# Altium PCB LKS_Motor_0313.PcbDoc (part 1 of 4)
Units mil, origin at the board's own origin, x right, y up, seen from the top; angles counter-clockwise.
Board outline 4321.51 x 591.52 mil, 2 copper layers (Top Layer, Bottom Layer); 107 components, 73 nets, 326 pads, 213 vias.
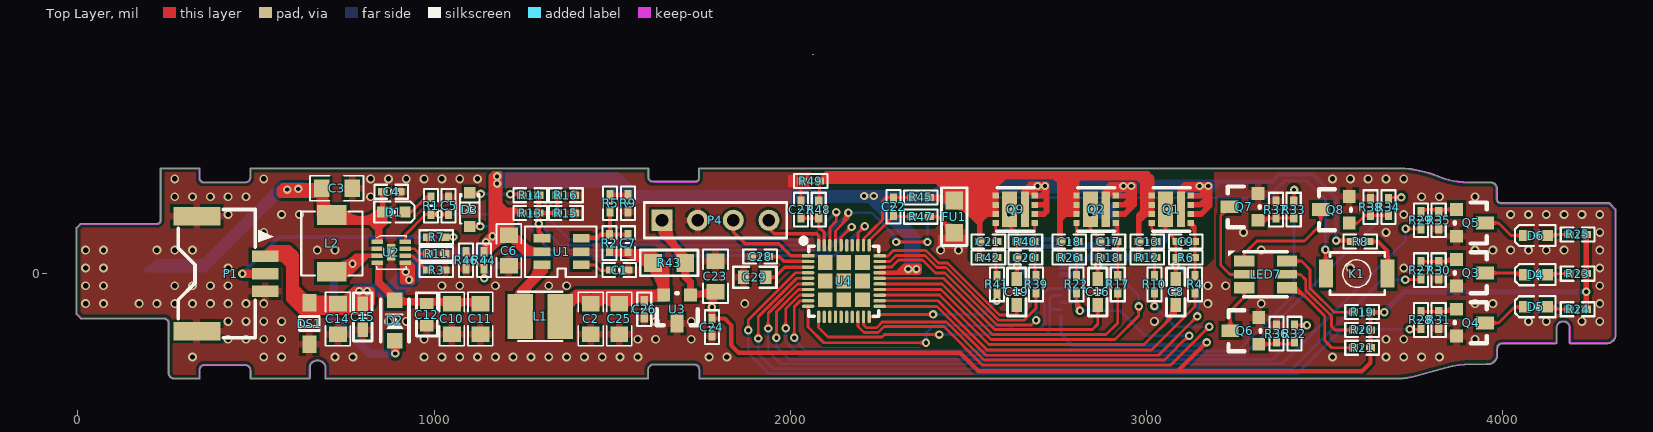
[diagram p0: Top Layer view]
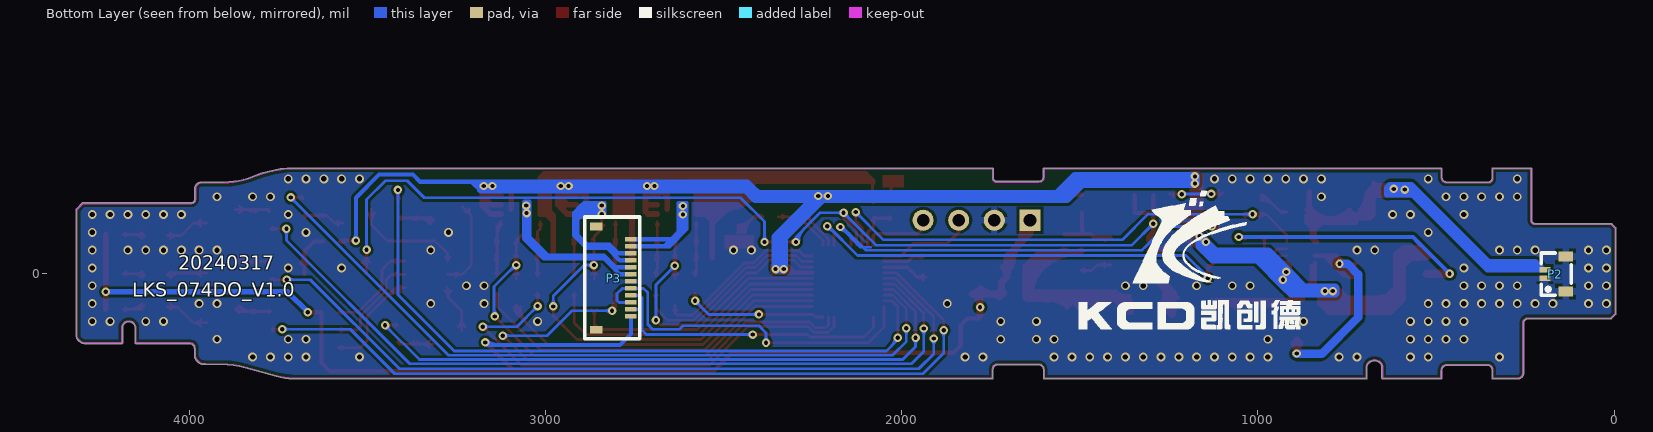
[diagram p1: Bottom Layer view, seen from below]
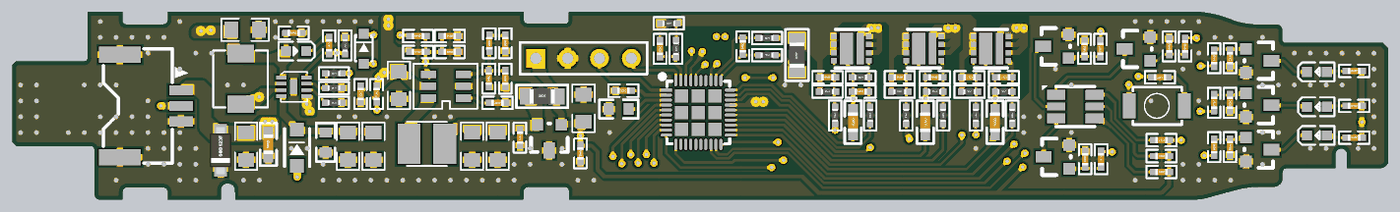
[diagram p5: 3D render of the assembled board from above, using the file's embedded part models]

## Layer stack, top to bottom
Top Solder: solder mask 0.4, Solder Resist, Dk 3.5
Top Layer: signal copper 1.4
Dielectric1: core 12.6, FR-4, Dk 4.8
Bottom Layer: signal copper 1.4
Bottom Solder: solder mask 0.4, Solder Resist, Dk 3.5

## Board outline
340.79,-295.23 ccw(c340.79,-293.25) 342.78,-293.25 342.78,-270.05 cw(c355.82,-270.05) 355.82,-257.01 469.32,-257.01 cw(c469.32,-271.91) 484.23,-271.91 484.23,-293.25 ccw(c486.21,-293.25) 486.21,-295.23 649.96,-295.23 ccw(c649.96,-293.25) 651.94,-293.25 651.94,-259.1 cw(c672.98,-266.47) 694.02,-259.1 694.02,-293.25 ccw(c696,-293.25) 696,-295.23 1599.85,-295.23 ccw(c1599.85,-293.25) 1601.84,-293.25 1601.84,-269.29 cw(c1615.4,-269.32) 1615.37,-255.76 1730.9,-255.76 cw(c1730.9,-268.67) 1743.81,-268.67 1743.81,-293.3 ccw(c1745.79,-293.3) 1745.79,-295.29 3708.08,-295.29 ccw(c3708.08,-293.3) 3708.1,-295.29 ccw(c3706.34,-133.03) 3754.89,-287.86 3826.52,-268.29 ccw(c3826,-266.38) 3826.58,-268.27 cw(c3922.68,-590.85) 3892.14,-255.65 3955.05,-254.61 ccw(c3958.35,-227.78) 3985.04,-232.11 ccw(c3983.08,-231.79) 3985.06,-231.79 ccw(c3983.08,-231.79) 3985.06,-231.77 3985.06,-210.33 cw(c3999.33,-210.33) 3999.33,-196.07 4149.75,-196.07 ccw(c4149.75,-194.08) 4151.73,-194.08 4151.73,-148.89 cw(c4169.43,-153) 4187.14,-148.89 4187.14,-194.29 ccw(c4189.12,-194.29) 4189.12,-196.28 4293.89,-196.28 ccw(c4293.91,-194.29) 4294.1,-196.27 ccw(c4291.6,-169.92) 4317.01,-177.29 ccw(c4315.11,-176.74) 4317.09,-176.74 4317.09,180.13 ccw(c4315.11,180.13) 4316.5,181.55 4316.51,181.54 4300,198.05 4300.01,198.03 ccw(c4298.6,196.64) 4298.6,198.63 3994.41,198.63 cw(c3994.41,209.02) 3984.02,209.02 3984.02,238.48 ccw(c3965.86,238.48) 3965.86,256.65 3903.32,256.65 cw(c3910.73,520.73) 3833.14,268.19 ccw(c3692.04,-53.42) 3725.14,296.22 ccw(c3724.95,294.25) 3724.95,296.23 1744.96,296.23 ccw(c1744.96,294.25) 1742.97,294.25 1742.97,268.35 ccw(c1744.96,268.35) 1742.97,268.33 cw(c1733.77,268.35) 1733.79,259.15 cw(c1733.77,268.35) 1733.77,259.15 1614.77,259.15 cw(c1614.77,271.56) 1602.36,271.56 1602.36,294.14 ccw(c1600.38,294.14) 1600.38,296.13 485.79,296.13 ccw(c485.79,294.14) 483.81,294.14 483.81,271.08 cw(c469.79,271.08) 469.79,257.06 352.69,257.06 cw(c352.69,266.98) 342.78,266.98 342.78,294.25 ccw(c340.79,294.25) 340.79,296.23 233.92,296.23 ccw(c233.92,294.25) 231.94,294.25 231.94,150.5 cw(c221.84,150.5) 221.84,140.4 7.83,140.4 ccw(c7.83,138.41) 6.41,139.81 6.42,139.82 -3.84,129.56 -3.83,129.57 ccw(c-2.43,128.15) -4.42,128.15 -4.42,-112.73 ccw(c-2.43,-112.73) -3.84,-114.13 7.93,-125.9 ccw(c9.34,-124.5) 9.34,-126.48 241.97,-126.48 cw(c241.97,-138.74) 254.23,-138.74 254.23,-278.75 ccw(c270.72,-278.75) 270.72,-295.23

## Design rules (kind name [scope] priority, off if disabled: settings)
Clearance [(InPoly)] p1: gap=8 ignorepadtopadclearanceinfootprint=FALSE except(0: Arc-Hole Track-Hole SMDPad-Hole THPad-Hole Via-Hole Fill-Hole Poly-Hole Region-Hole Text-Hole)
ComponentClearance [All] p1 off: gap=10 collisioncheckmode=3 verticalgap=10 showdistances=FALSE
FabricationTestpoint [(IsPad And (OnTopLayer Or OnBottomLayer))] p1: side=3 testpointundercomponent=TRUE minsize=40 maxsize=100 preferedsize=60 minholesize=0 maxholesize=40 preferedholesize=32 testpointgrid=1 allowsidetop=TRUE allowsidebottom=TRUE usegrid=TRUE gridtolerance=0.01
HoleSize [All] p1: absolutevalues=TRUE maxlimit=200 minlimit=1 maxpercent=80.000 minpercent=20.000
HoleToHoleClearance [All] p1: gap=5 allowstackedmicrovias=TRUE
MinimumSolderMaskSliver [All] p1 off: minsoldermaskwidth=5
PlaneClearance [All] p1: clearance=7
PolygonConnect PolygonConnect_1 [IsPad] p1: connectstyle=Relief reliefconductorwidth=20 reliefentries=4 polygonreliefangle="90 Angle" airgapwidth=10
PolygonConnect [All] p2: connectstyle=Direct reliefconductorwidth=20 reliefentries=4 polygonreliefangle="90 Angle" airgapwidth=10
RoutingVias [All] p1: holewidth=18 width=30 viastyle="Through Hole" minholewidth=11.81 minwidth=19.68 maxholewidth=39.37 maxwidth=78.74
SilkToSilkClearance [All] p1 off: silktosilkclearance=5
SilkToSolderMaskClearance SilkscreenOverComponentPads [IsPad] p1 off: minsilkscreentomaskgap=5 clearancetoexposedcopper=TRUE
SolderMaskExpansion [All] p1: expansion=4 istentingtop=FALSE
Width [All] p1: maxlimit=100 minlimit=5 preferedwidth=8
22 further rules are at their usual default settings.

## Components (designator, comment, footprint, x,y, rotation, side; value= is the part's Value field where it differs from the comment)
C1 "1uF/16V" "C 0402_M" 1520,10 r180 top
C2 "10uF/16V" 0805C 1440,-130 r90 top
C3 "22uF/25V" 0805C 730,240 r180 top
C4 "1uF/25V" "C 0402_M" 880,230 r0 top
C5 "103" "R 0402_M" 1041,190.5 r270 top
C6 "10uF/16V" 0805C 1210,61.86 r90 top
C7 "10pF/16V" "C 0402_M" 1544,86.06 r270 top
C8 "4.7uF/25V" "C 0603_M" 3081.87,-51.26 r270 top
C9 "1nF" "C 0402_M" 3110,90 r0 top
C10 "22uF/25V" 0805C 1050,-130 r90 top
C11 "22uF/25V" 0805C 1130,-130 r90 top
C12 "4.7uF/25V" 0603 980,-114.9 r90 top
C13 "1nF" "C 0402_M" 3001.87,90 r0 top
C14 "22uF/25V" 0805C 730,-130 r90 top
C15 "1uF/25V" "C 0603_M" 800,-121.05 r90 top
C16 "4.7uF/25V" "C 0603_M" 2863,-51.26 r270 top
C17 "1nF" "C 0402_M" 2893,90 r0 top
C18 "1nF" "C 0402_M" 2783,90 r0 top
C19 "4.7uF/25V" "C 0603_M" 2636.06,-51.26 r270 top
C20 "1nF" "C 0402_M" 2660,45 r0 top
C21 "1nF" "C 0402_M" 2556,90 r0 top
C22 "NC" "C 0402_M" 2290,188.03 r90 top
C23 "10uF/10V" 0805C 1790,-4.55 r270 top
C24 "100nF" "C 0402_M" 1780,-150 r270 top
C25 "10uF/10V" 0805C 1520,-130 r90 top
C26 "100nF/10V" "C 0402_M" 1590,-100 r270 top
C27 "1nF/50V" "C 0402_M" 2030,180 r270 top
C28 "100nF/50V" "C 0402_M" 1915.11,48.03 r180 top
C29 "1uF/10V" 0603 1900,-10 r0 top
D1 "LED_R" 0603-LED 890,170 r180 top
D2 "SS34" SOD123FL 890,-140 r90 top
D3 "4148" SOD-323 1100,180 r270 top
D4 "LED_R" 0603-LED 4090,0 r0 top
D5 "LED_R" 0603-LED 4090,-90 r0 top
D6 "LED_R" 0603-LED 4090,110 r0 top
DS1 "SMF12CA-MS" SOD-123F 650,-140 r90 top
FU1 "0.05R" "R 0805_M" 2460,160 r90 top
K1 "K1" Button3x4x2 3590,0 r180 top locked
L1 "6.8uH" SMD3X3 1300,-130 r180 top
L2 "4.7uH" 0420-L 710,80 r270 top
LED7 "RGB3528" SMD3528-RGB 3340,0 r180 top
P1 "Header 3" X9827WRS-3P 430,5 r270 top locked
P2 "Header 2" CONN_SMD_2P_0.6 160,0 r90 bottom locked
P3 "Header 12" SMD-12 2760,-120 r90 bottom locked
P4 "Header 4" HDR1X4 1640,150 r0 top
Q1 "CJBM3020" DFN-3X3_8 3124,142.06 r90 top
Q2 "CJBM3020" DFN-3X3_8 2913,142.06 r90 top
Q3 "J3Y" SOT-23 3870,40 r270 top
Q4 "J3Y" SOT-23 3870,-100 r270 top
Q5 "J3Y" SOT-23 3870,180 r270 top
Q6 "J3Y" SOT-23 3315,-198 r90 top
Q7 "J3Y" SOT-23 3313,150 r90 top
Q8 "J3Y" SOT-23 3569,142 r90 top
Q9 "CJBM3020" DFN-3X3_8 2686,142.06 r90 top
R1 "4.7K" "C 0402_M" 991,190.5 r90 top
R2 "2.5M" "C 0402_M" 1492.44,86.06 r90 top
R3 "510" "R 0402_M" 1006,10 r0 top
R4 "10R" "R 0402_M" 3135.81,-30 r270 top
R5 "340K" "C 0402_M" 1494,197.56 r90 top
R6 "10K" "R 0402_M" 3110,45 r180 top
R7 "RS/NC" "R 0402_M" 1006,102.13 r180 top
R8 "200K" "C 0402_M" 3600,90 r180 top
R9 "0" "C 0402_M" 1544,197.56 r270 top
R10 "10R" "R 0402_M" 3021.87,-30 r270 top
R11 "RP/NC" "R 0402_M" 1006,56.06 r0 top
R12 "10K" "R 0402_M" 3001.87,45 r180 top
R13 "1.5M/NC" "C 0402_M" 1270,170 r0 top
R14 "1K" "C 0402_M" 1270,220 r0 top
R15 "100K" "C 0402_M" 1370,170 r180 top
R16 "100K" "C 0402_M" 1370,220 r0 top
R17 "10R" "R 0402_M" 2919.06,-30 r270 top
R18 "10K" "R 0402_M" 2893,45 r180 top
R19 "1K" "C 0402_M" 3604.87,-108 r0 top
R20 "1K" "C 0402_M" 3604.87,-158 r0 top
R21 "1K" "C 0402_M" 3604.87,-208 r0 top
R22 "10R" "R 0402_M" 2803,-30 r270 top
R23 "1K" "C 0402_M" 4210,0 r0 top
R24 "1K" "C 0402_M" 4210,-100 r0 top
R25 "1K" "C 0402_M" 4210,110 r0 top
R26 "10K" "R 0402_M" 2783,45 r180 top
R27 "10K" "C 0402_M" 3770,10 r270 top
R28 "10K" "C 0402_M" 3770,-130 r270 top
R29 "10K" "C 0402_M" 3770,150 r270 top
R30 "100K" "C 0402_M" 3820,10 r270 top
R31 "100K" "C 0402_M" 3820,-130 r270 top
R32 "10K" "C 0402_M" 3415,-168 r90 top
R33 "10K" "C 0402_M" 3413,180 r90 top
R34 "10K" "C 0402_M" 3679,187 r90 top
R35 "100K" "C 0402_M" 3820,150 r270 top
R36 "100K" "C 0402_M" 3365,-168 r90 top
R37 "100K" "C 0402_M" 3363,180 r90 top
R38 "100K" "C 0402_M" 3629,187 r90 top
R39 "10R" "R 0402_M" 2690,-30 r270 top
R40 "10K" "R 0402_M" 2660,90 r180 top
R41 "10R" "R 0402_M" 2580,-30 r270 top
R42 "10K" "R 0402_M" 2556,45 r180 top
R43 "0R/NC" "R 0805_M" 1660,30 r0 top
R44 "2M" "C 0402_M" 1140,37.56 r270 top
R45 "1K1%" "R 0402_M" 2366.06,213.94 r180 top
R46 "470K" "C 0402_M" 1090,37.56 r270 top
R47 "1K1%" "R 0402_M" 2366.06,160 r180 top
R48 "1K" "R 0402_M" 2080,180 r270 top
R49 "10R" "R 0402_M" 2057.56,260 r180 top
U1 "CS5503R" SOT23-6L 1360,60 r180 top
U2 "CS5090EL" DFN2X2_8_0.5 880,60 r270 top
U3 "CJ6376A33MY" SOT-23 1720,-60 r180 top
U4 "LKS32MC074DOF8Q8" QFN40 2150,-20 r0 top

## Footprints (in the part's own frame and the unit in brackets; to place one, negate y for a bottom-side part, rotate by r counter-clockwise, add the part's x,y. Pads: shape width x height; smd on the part's side, far side on the other; paste and mask are expansions set on the pad)
0420-L [mm]
  rect 1.4x2.12 smd: 1(1.901,0.076) 2(-2.155,0.076)
  silkscreen extent -2.4,-2.1 2.15,2.25
0603 [mm]
  rect 0.8x0.955 smd: 1(-0.795,0) 2(0.795,0)
  silkscreen extent -1.53,-0.75 1.56,0.75
0603-LED [mm]
  rect 0.8x0.8 smd: 1(0.876,-0.073) 2(-0.723,-0.08)
  silkscreen extent -1.41,-0.82 1.47,0.68
0805C [mm]
  rect 1.1x1.27 smd: 1(-1.016,0) 2(1.159,0)
  silkscreen extent -1.83,-0.89 1.98,0.89
Button3x4x2 [mm]
  rect 1x2 smd: 1(-2.2,0) 2(2.2,0)
  silkscreen extent -2,-1.5 1.9,1.5
"C 0402_M" [mil] "无极性贴片电容"
  rect 26x20 smd: 1(-24,0) 2(24,0)
  silkscreen extent -47,-20 47,20, body extent -20,-10 20,10, height 21
"C 0603_M" [mil] "无极性贴片电容"
  rect 40x30 smd: 1(-36.5,0) 2(36.5,0)
  silkscreen extent -68,-26 68,26, body extent -31,-16 31,16, height 32
CONN_SMD_2P_0.6 [mm]
  rect 0.4x0.8 smd: 1(-0.324,0.871) 2(0.276,0.871)
  rect 0.7x1.05 smd: 3(1.226,-0.604) 4(-1.274,-0.604)
  silkscreen extent -1.52,-1.01 1.48,1.15
DFN2X2_8_0.5 [mm]
  rect 0.3x0.8 smd: 1(-0.75,-1) 2(-0.25,-1) 3(0.25,-1) 4(0.75,-1) 5(0.75,1) 6(0.25,1) 7(-0.25,1) 8(-0.75,1)
  rect 1.2x0.6 smd: 9(0,0)
  silkscreen extent -1.19,-1.02 1.2,1.08
DFN-3X3_8 [mil]
  rect 17x18 smd: 1(0,0) 2(25.59,0) 3(51.18,0) 4(76.77,0) 5(76.77,109.58) 6(51.18,109.58) 7(25.59,109.58) 8(0,109.58)
  rect 100x23 smd: 9(38.33,27.5)
  rect 100x42 smd: 10(38.33,70.83)
  silkscreen extent -23,2 99,106
HDR1X4 [mm] "Connector; Header; 4 Position"
  rect 1.5x1.5 hole 0.9: 1(0,0)
  round 1.5 hole 0.9: 2(2.54,0) 3(5.08,0) 4(7.62,0)
  silkscreen extent -1.27,-1.27 8.89,1.27
QFN40 [mm]
  rect 1.05x1.05 smd: 0(-1.32,-1.352) 0(-1.32,1.308) 0(-1.32,-0.022) 0(0.01,-0.022) 0(0.01,-1.352) 0(0.01,1.308) 0(1.34,-1.352) 0(1.34,-0.022) 0(1.34,1.308)
  rect 0.9x0.24 smd: 1(-2.54,1.778)
  oval 0.9x0.24 smd: 2(-2.54,1.378) 3(-2.54,0.978) 4(-2.54,0.578) 5(-2.54,0.178) 6(-2.54,-0.222) 7(-2.54,-0.622) 8(-2.54,-1.022) 9(-2.54,-1.422) 10(-2.54,-1.822) 21(2.56,-1.822) 22(2.56,-1.422) 23(2.56,-1.022) 24(2.56,-0.622) 25(2.56,-0.222) 26(2.56,0.178) 27(2.56,0.578) 28(2.56,0.978) 29(2.56,1.378) 30(2.56,1.778)
  oval 0.24x0.9 smd: 11(-1.79,-2.572) 12(-1.39,-2.572) 13(-0.99,-2.572) 14(-0.59,-2.572) 15(-0.19,-2.572) 16(0.21,-2.572) 17(0.61,-2.572) 18(1.01,-2.572) 19(1.41,-2.572) 20(1.81,-2.572) 31(1.81,2.528) 32(1.41,2.528) 33(1.01,2.528) 34(0.61,2.528) 35(0.21,2.528) 36(-0.19,2.528) 37(-0.59,2.528) 38(-0.99,2.528) 39(-1.39,2.528) 40(-1.79,2.528)
  silkscreen extent -2.98,-2.52 2.51,2.97
"R 0402_M" [mil] "1/16W贴片电阻"
  rect 26x20 smd: 1(-24,0) 2(24,0)
  silkscreen extent -47,-20 47,20, body extent -20,-10 20,10, height 12
"R 0805_M" [mil] "1/8W贴片电阻"
  rect 50x50 smd: 1(-45,0) 2(45,0)
  silkscreen extent -81,-36 81,36, body extent -39,-25 39,25, height 20
SMD3X3 [mil]
  rect 71.81x126.77 smd: 1(58.22,-10) 2(-54.22,-10)
  silkscreen extent -60,-79 64,59
SMD3528-RGB [mm]
  rect 1.45x0.8 smd: 1(1.677,-0.899) 3(1.677,1.001) 4(-1.373,1.001) 6(-1.373,-0.899)
  rect 1.45x0.6 smd: 2(1.677,0.051) 5(-1.373,0.051)
  silkscreen extent -1.4,-1.65 2.8,1.65
SMD-12 [mil]
  rect 22x36 smd: 0(252.38,97.5) 0/2(-37.62,97.5)
  rect 13x32 smd: 1(216.53,0) 2(196.85,0) 3(177.17,0) 4(157.48,0) 5(137.79,0) 6(118.11,0) 7(98.42,0) 8(78.74,0) 9(59.05,0) 10(39.37,0) 11(19.69,0) 12(0,0)
  silkscreen extent -62,-25 279,130
SOD123FL [mm]
  rect 1.1x1.1 smd: 1(-1.228,-0.006) 2(1.673,-0.006)
  silkscreen extent -1.28,-1.01 1.72,0.99
SOD-123F [mm]
  rect 1.25x1 smd: 1(1.475,0) 2(-1.475,0)
  silkscreen extent -0.5,-0.7 0.5,0.7, body extent -1.9,-0.85 1.85,0.85, height 1.2
SOD-323 [mm]
  rect 0.8x0.8 smd: 1(1.2,0) 2(-1.2,0)
  silkscreen extent -1.1,-0.7 1,0.7
SOT23-6L [mm]
  rect 1.2x0.6 smd: 1(-1.349,0.899) 2(-1.349,-0.051) 3(-1.349,-1.001) 4(1.451,-1.001) 5(1.451,-0.051) 6(1.451,0.899)
  silkscreen extent -2.45,-1.85 2.65,1.75
SOT-23 [mil]
  rect 36x36 smd: 1(0,0) 2(75,0)
  rect 36x50 smd: 3(38,80)
  silkscreen extent -20,-5 95,85
X9827WRS-3P [mm]
  rect 0.8x1.9 smd: 1(-1.123,2.438) 2(0.127,2.438) 3(1.377,2.438)
  rect 1.3x3.35 smd: 4(4.227,-2.438) 5(-3.973,-2.438)
  silkscreen extent -4.45,-3.76 4.7,3.04

## Part data
C1 C4 C24: library part CAP
C2 C3 C5 C6 C7 C8 C9 C10 C11 C12 C13 C14 C15 C16 C17 C18 C19 C20 C21 C22 C23 C25 C26: library part CAP, "Capacitor"
C27 C28 C29: library part C, "Capacitor"
D1 D4 D5 D6: library part LED
D2 D3: library part Diode, "Default Diode"
DS1: library part DIODE-3, "12V/19.9V"
FU1 R4 R6 R10 R12 R17 R18 R22 R26 R39 R40 R41 R42 R45 R47 R48 R49: library part RAS
L1 L2: library part Inductor, "Inductor"
LED7: library part RGB5050
P1: "Header, 3-Pin"
P2: "Header, 2-Pin"
P3: "Header, 12-Pin"
P4: "Header, 4-Pin"
Q3 Q4 Q5 Q6 Q7 Q8: library part NPN, "NPN Transistor"
R1 R2 R3 R5 R7 R8 R9 R11 R13 R14 R15 R16 R19 R20 R21 R23 R24 R25 R27 R28 R29 R30 R31 R32 R33 R34 R35 R36 R37 R38 R43 R44 R46: library part RES2_S
U3: library part 78L15
U4: library part LKS32MC074DF8Q8, "芯片"

## Via types
v1: diameter 25, hole 15, Top Layer to Bottom Layer, tented both sides, 139 vias
v2: diameter 23.62, hole 11.81, Top Layer to Bottom Layer, 74 vias

## Nets (pads, with @x,y where several pads share a name; then routed paths per layer and width w, separated by ;. In a path a pad name is that pad's centre, name@x,y a point inside that pad or via, vN(x,y) a via of type N, cw(c..) or ccw(c..) an arc to the next point about the centre after c; other vN are vias at no path point)
1ST: R29.2 U4.6 | length 2551.8
  Top Layer w7.87: v2(1938,-154) 1938,-111 2020.26,-28.74 U4.6@2050,-28.74 ; v2@3736,126 R29.2@3770,126 ; 1938,-134.99 ccw(c1957.01,-134.99) 1943.57,-148.43 cw(c1957.01,-134.99) 1938,-134.99 ; 1938,-134.99 cw(c1918.99,-134.99) 1932.43,-148.43 ccw(c1918.99,-134.99) 1938,-134.99 ; 3746.01,126 ccw(c3746.01,106.99) 3732.57,120.43 cw(c3746.01,106.99) 3746.01,126 ; 3746.01,126 cw(c3746.01,145.01) 3732.57,131.57 ccw(c3746.01,145.01) 3746.01,126 ; 3755.36,126 ccw(c3755.36,140.64) 3765.71,130.29 cw(c3755.36,140.64) 3755.36,126 ; 3755.36,126 cw(c3755.36,111.36) 3765.71,121.71 ccw(c3755.36,111.36) 3755.36,126
  Bottom Layer w7.87: v2(1938,-154) 1938,-218 1973,-253 3381,-253 3727,93 v2(3727,126) ; 1938,-173.01 ccw(c1918.99,-173.01) 1932.43,-159.57 cw(c1918.99,-173.01) 1938,-173.01 ; 1938,-173.01 cw(c1957.01,-173.01) 1943.57,-159.57 ccw(c1957.01,-173.01) 1938,-173.01 ; 3727,106.99 ccw(c3707.99,106.99) 3721.43,120.43 cw(c3707.99,106.99) 3727,106.99 ; 3727,106.99 cw(c3746.01,106.99) 3732.57,120.43 ccw(c3746.01,106.99) 3727,106.99
2ND: R27.2 U4.5 | length 2555.8
  Top Layer w7.87: v2(1910,-182) 1910,-121 2018.01,-12.99 U4.5@2050,-12.99 ; v2(3726,-17) 3767,-17 R27.2@3770,-14 ; 1910,-162.99 ccw(c1929.01,-162.99) 1915.57,-176.43 cw(c1929.01,-162.99) 1910,-162.99 ; 1910,-162.99 cw(c1890.99,-162.99) 1904.43,-176.43 ccw(c1890.99,-162.99) 1910,-162.99 ; 3745.01,-17 ccw(c3745.01,-36.01) 3731.57,-22.57 cw(c3745.01,-36.01) 3745.01,-17 ; 3745.01,-17 cw(c3745.01,2.01) 3731.57,-11.43 ccw(c3745.01,2.01) 3745.01,-17 ; 3755.36,-17 ccw(c3755.36,-2.36) 3765.71,-12.71 cw(c3755.36,-2.36) 3755.36,-17 ; 3755.36,-17 cw(c3755.36,-31.64) 3765.71,-21.29 ccw(c3755.36,-31.64) 3755.36,-17
  Bottom Layer w7.87: v2(1910,-182) 1910,-225 1952,-267 3410,-267 3660,-17 v2(3726,-17) ; 1910,-201.01 ccw(c1890.99,-201.01) 1904.43,-187.57 cw(c1890.99,-201.01) 1910,-201.01 ; 1910,-201.01 cw(c1929.01,-201.01) 1915.57,-187.57 ccw(c1929.01,-201.01) 1910,-201.01 ; 3706.99,-17 ccw(c3706.99,2.01) 3720.43,-11.43 cw(c3706.99,2.01) 3706.99,-17 ; 3706.99,-17 cw(c3706.99,-36.01) 3720.43,-22.57 ccw(c3706.99,-36.01) 3706.99,-17
3RD: R28.2 U4.4 | length 2562.7
  Top Layer w7.87: v2(1882,-159) 1882,-130 2014.76,2.76 U4.4@2050,2.76 ; v2(3739,-156) R28.2@3768,-156 ; 1882,-139.99 ccw(c1901.01,-139.99) 1887.57,-153.43 cw(c1901.01,-139.99) 1882,-139.99 ; 1882,-139.99 cw(c1862.99,-139.99) 1876.43,-153.43 ccw(c1862.99,-139.99) 1882,-139.99 ; 3758.01,-156 ccw(c3758.01,-175.01) 3744.57,-161.57 cw(c3758.01,-175.01) 3758.01,-156 ; 3758.01,-156 cw(c3758.01,-136.99) 3744.57,-150.43 ccw(c3758.01,-136.99) 3758.01,-156 ; 3752.95,-156 cw(c3752.95,-174.05) 3765.71,-161.29 ccw(c3752.95,-174.05) 3752.95,-156 ; 3757.78,-156 ccw(c3757.78,-144.78) 3765.71,-152.71 cw(c3757.78,-144.78) 3757.78,-156
  Bottom Layer w7.87: v2(1882,-159) 1882,-223 1940,-281 3423,-281 3548,-156 v2(3739,-156) ; 1882,-178.01 ccw(c1862.99,-178.01) 1876.43,-164.57 cw(c1862.99,-178.01) 1882,-178.01 ; 1882,-178.01 cw(c1901.01,-178.01) 1887.57,-164.57 ccw(c1901.01,-178.01) 1882,-178.01 ; 3719.99,-156 ccw(c3719.99,-136.99) 3733.43,-150.43 cw(c3719.99,-136.99) 3719.99,-156 ; 3719.99,-156 cw(c3719.99,-175.01) 3733.43,-161.57 ccw(c3719.99,-175.01) 3719.99,-156
+3.3V: C23.2 C24.1 P3.12 P4.1 R19.2 R20.2 R21.2 R23.2 R24.2 R25.2 R43.2 U3.1 | length 5073.1
  Top Layer w11.81: C24.1@1780,-126 1816,-126 1834,-144 1834,-201 1855,-222 1878,-222 ; 1858,-222 1878,-222 ; v2@3163,-198 3087,-274 ; v2(3667,-108) R19.2@3628.87,-108 R20.2@3628.87,-158 R21.2@3628.87,-208 3628.87,-250.13 3605,-274 3087,-274 ; 1878,-222 2476,-222 2528,-274 3087,-274 ; 3652.74,-108 ccw(c3652.74,-93.74) 3662.82,-103.82 cw(c3652.74,-93.74) 3652.74,-108 ; 3652.74,-108 cw(c3652.74,-122.26) 3662.82,-112.18 ccw(c3652.74,-122.26) 3652.74,-108 ; 3157.21,-203.79 cw(c3169,-215.58) 3169,-198.91 ccw(c3169,-215.58) 3157.21,-203.79 ; 3159.63,-201.37 ccw(c3151.25,-193) 3163.09,-193 cw(c3151.25,-193) 3159.63,-201.37
  Top Layer w15.75: R24.2@4234,-100 v2(4234,-51) R23.2@4234,0 R25.2@4234,110
  Top Layer w19.68: U3.1@1720,-60 1720,-24 1705,-9 R43.2@1705,30 1705,48 1640,113 ; U3.1@1732,-57 C23.2@1803,-57 ; C24.1@1780,-116 v2(1780,-94) 1780,-60.18 C23.2@1790,-50.18 ; P4.1@1629,133.67 cw(c1615.07,113) 1640,113 ; P4.1@1629,133.67 cw(c1615.07,113) 1640,113 ; P4.1@1629,133.67 cw(c1615.07,113) 1640,113 ; P4.1@1629,133.67 cw(c1615.07,113) 1640,113 ; 1640,113 cw(c1664.93,113) P4.1@1651,133.67 ; 1640,113 cw(c1664.93,113) P4.1@1651,133.67 ; 1640,113 cw(c1664.93,113) P4.1@1651,133.67 ; 1640,113 cw(c1664.93,113) P4.1@1651,133.67 ; 1640,113 P4.1@1640,150 ; P4.1@1640,150 ccw(c1705.02,140.84) 1658.59,94.41 cw(c1705.02,140.84) P4.1@1640,150 ; 1705,-6.59 ccw(c1668.41,-6.59) 1694.28,19.28 cw(c1668.41,-6.59) 1705,-6.59 ; 1705,-6.59 cw(c1741.59,-6.59) 1715.72,19.28 ccw(c1741.59,-6.59) 1705,-6.59 ; 1720,-40.31 ccw(c1739.69,-40.31) 1725.77,-54.23 cw(c1739.69,-40.31) 1720,-40.31 ; 1720,-40.31 cw(c1700.31,-40.31) 1714.23,-54.23 ccw(c1700.31,-40.31) 1720,-40.31 ; P4.1@1659.49,147.25 ccw(c1753.94,133.95) 1686.5,66.5 cw(c1753.94,133.95) P4.1@1659.49,147.25 ; 1666.4,86.6 cw(c1609.79,30) 1689.84,30 ccw(c1609.79,30) 1666.4,86.6 ; U3.1@1725.77,-65.77 cw(c1746.94,-86.94) 1746.94,-57 ccw(c1746.94,-86.94) U3.1@1725.77,-65.77 ; 1741.67,-57 ccw(c1741.67,-5.19) 1778.3,-41.83 cw(c1741.67,-5.19) 1741.67,-57 ; v2@1780,-94.5 cw(c1830.62,-94.5) 1794.97,-58.56 ccw(c1830.62,-94.5) v2@1780,-94.5
  Bottom Layer w11.81: P3.12@2760,-120 2760,-169 2791,-200 3162,-200 v2(3169,-193) ; 3137.84,-200 ccw(c3137.84,-161.84) 3164.82,-188.82 cw(c3137.84,-161.84) 3137.84,-200
  Bottom Layer w15.75: v2(3667,-108) 3724,-51 v2(4234,-51)
BAT_ADC: R44.2 R46.1 U4.33 | length 1663.8
  Top Layer w7.87: R46.1@1099,54 R44.2@1139,14 ; R44.2@1140,16.56 1140,-12 v2(1141,-13) ; 2189.76,104.76 U4.33@2189.76,79.53 2189.76,113.76 v2(2209,133) ; v2@1140,-4.08 ccw(c1125.36,-4.08) 1135.71,6.27 cw(c1125.36,-4.08) v2@1140,-4.08 ; v2@1140,-4.08 cw(c1154.64,-4.08) 1144.29,6.27 ccw(c1154.64,-4.08) v2@1140,-4.08 ; 2195.56,119.56 ccw(c2182.12,133) 2201.13,133 cw(c2182.12,133) 2195.56,119.56 ; 2195.56,119.56 cw(c2209,106.12) 2209,125.13 ccw(c2209,106.12) 2195.56,119.56 ; R46.1@1090,52.5 cw(c1090,27.14) 1107.93,45.07 ccw(c1090,27.14) R46.1@1090,52.5 ; 1123.57,29.43 ccw(c1140,45.85) 1140,22.62 cw(c1140,45.85) 1123.57,29.43 ; v2@1135.43,-7.43 ccw(c1124.4,3.6) 1140,3.6 cw(c1124.4,3.6) v2@1135.43,-7.43 ; R44.2@1140,8.42 ccw(c1162.42,8.42) 1146.57,-7.43 cw(c1162.42,8.42) R44.2@1140,8.42
  Bottom Layer w7.87: v2(1141,-13) 1141,-10 1202,51 2124,51 v2@2207.5,134.5 ; v2@1141,-5.13 ccw(c1141,6.64) 1149.32,-1.68 cw(c1141,6.64) v2@1141,-5.13 ; v2@1148.87,-13 cw(c1175.13,-13) 1156.56,5.56 ccw(c1175.13,-13) v2@1148.87,-13 ; 2190.44,117.44 cw(c2209,98.87) 2209,125.13 ccw(c2209,98.87) 2190.44,117.44 ; 2197.68,124.68 ccw(c2189.36,133) 2201.13,133 cw(c2189.36,133) 2197.68,124.68
BLUE: R32.2 U4.7 | length 2075.4
  Top Layer w7.87: v2(1961,-180) 1961,-107 2023.51,-44.49 U4.7@2050,-44.49 ; R32.2@3415,-144 v2@3449,-144 ; 1961,-160.99 ccw(c1980.01,-160.99) 1966.57,-174.43 cw(c1980.01,-160.99) 1961,-160.99 ; 1961,-160.99 cw(c1941.99,-160.99) 1955.43,-174.43 ccw(c1941.99,-160.99) 1961,-160.99 ; 3429.64,-144 ccw(c3429.64,-158.64) 3419.29,-148.29 cw(c3429.64,-158.64) 3429.64,-144 ; 3429.64,-144 cw(c3429.64,-129.36) 3419.29,-139.71 ccw(c3429.64,-129.36) 3429.64,-144 ; 3428.58,-144 cw(c3428.58,-166.42) 3444.43,-150.57 ccw(c3428.58,-166.42) 3428.58,-144 ; 3433.4,-144 ccw(c3433.4,-128.4) 3444.43,-139.43 cw(c3433.4,-128.4) 3433.4,-144
  Bottom Layer w7.87: v2(1961,-180) 1961,-205 1997,-241 3354,-241 v2(3450,-145) ; 1961,-199.01 ccw(c1941.99,-199.01) 1955.43,-185.57 cw(c1941.99,-199.01) 1961,-199.01 ; 1961,-199.01 cw(c1980.01,-199.01) 1966.57,-185.57 ccw(c1980.01,-199.01) 1961,-199.01 ; 3436.56,-158.44 ccw(c3423.12,-145) 3442.13,-145 cw(c3423.12,-145) 3436.56,-158.44 ; 3436.56,-158.44 cw(c3450,-171.88) 3450,-152.87 ccw(c3450,-171.88) 3436.56,-158.44
BUTTON: K1.2 R13.2 R14.2 R15.2 R16.1 U1.4 U4.37 | length 3950.2
  Top Layer w7.87: U4.37@2126.77,79.53 2126.77,101 ; 2126.77,111.77 2126.77,101 ; v2(2297,89) v2(2385,89) ; v2@2302.57,83.43 cw(c2316.01,69.99) 2316.01,89 cw(c2316.01,108.01) v2@2302.57,94.57 ; v2@2379.43,83.43 ccw(c2365.99,69.99) 2365.99,89 ccw(c2365.99,108.01) v2@2379.43,94.57 ; v2(3502,67) 3502,1.39 K1.2@3503.39,0 ; 2126.77,101 2126.77,119.77 2163,156 v2(2163,171) ; v2(2163,171) cw(c2126.79,171) 2152.39,145.39 ccw(c2126.79,171) v2(2163,171) ; 3502,47.99 ccw(c3482.99,47.99) 3496.43,61.43 cw(c3482.99,47.99) 3502,47.99 ; 3502,47.99 cw(c3521.01,47.99) 3507.57,61.43 ccw(c3521.01,47.99) 3502,47.99 ; 2138.95,131.95 ccw(c2099.9,171) 2155.13,171 cw(c2099.9,171) 2138.95,131.95 ; K1.2@3492.25,30.82 ccw(c3468.71,54.36) 3502,54.36 cw(c3468.71,54.36) K1.2@3492.25,30.82 ; 3502,42.04 ccw(c3525.74,42.04) 3508.95,25.25 cw(c3525.74,42.04) 3502,42.04 ; v2@3502,61.05 ccw(c3544.75,61.05) 3514.52,30.82 cw(c3544.75,61.05) v2@3502,61.05
  Top Layer w11.81: R13.2@1294,170 R15.2@1346,170 ; R14.2@1294,220 v2(1294,140) 1294,118.28 U1.4@1302.88,109.4 ; 1346,180 R16.1@1346,220 ; 1294,125.74 ccw(c1279.74,125.74) 1289.82,135.82 cw(c1279.74,125.74) 1294,125.74 ; 1294,125.74 cw(c1308.26,125.74) 1298.18,135.82 ccw(c1308.26,125.74) 1294,125.74 ; 1294,154.26 ccw(c1308.26,154.26) 1298.18,144.18 cw(c1308.26,154.26) 1294,154.26 ; 1294,154.26 cw(c1279.74,154.26) 1289.82,144.18 ccw(c1279.74,154.26) 1294,154.26 ; 1293.55,118.73 cw(c1280.74,105.92) 1296.07,96.25 ccw(c1280.74,105.92) 1293.55,118.73 ; U1.4@1304.01,108.28 cw(c1293.56,97.83) 1306.06,89.95 ccw(c1293.56,97.83) U1.4@1304.01,108.28
  Bottom Layer w7.87: v2(1294,140) 1354,80 2072,80 2121,129 ; 2131,139 2121,129 ; 2273.66,126.34 cw(c2236.32,89) v2@2289.13,89 ; 2287.1,112.9 cw(c2263.2,89) v2(2297,89) 2297,103 2229,171 v2(2163,171) 2121,129 ; v2@2379.43,94.57 ccw(c2365.99,108.01) 2385,108.01 ccw(c2404.01,108.01) v2@2390.57,94.57 ; v2(2385,89) 2385,146 2452,213 3340,213 3388,261 3449,261 3502,208 3502,103 v2(3502,67) ; 1307.44,126.56 ccw(c1294,113.12) 1294,132.13 cw(c1294,113.12) 1307.44,126.56 ; 1307.44,126.56 cw(c1320.88,140) 1301.87,140 ccw(c1320.88,140) 1307.44,126.56 ; 2149.56,157.56 ccw(c2136.12,171) 2155.13,171 cw(c2136.12,171) 2149.56,157.56 ; 2149.56,157.56 cw(c2163,144.12) 2163,163.13 ccw(c2163,144.12) 2149.56,157.56 ; 2182.01,171 ccw(c2182.01,151.99) 2168.57,165.43 cw(c2182.01,151.99) 2182.01,171 ; 2182.01,171 cw(c2182.01,190.01) 2168.57,176.57 ccw(c2182.01,190.01) 2182.01,171 ; v2@3496.43,72.57 ccw(c3482.99,86.01) 3502,86.01 ; v2@3496.43,72.57 ccw(c3482.99,86.01) 3502,86.01 ; v2@3496.43,72.57 ccw(c3482.99,86.01) 3502,86.01 ; 3502,86.01 ccw(c3521.01,86.01) v2@3507.57,72.57 ; 3502,86.01 ccw(c3521.01,86.01) v2@3507.57,72.57 ; 3502,86.01 ccw(c3521.01,86.01) v2@3507.57,72.57
CH_STAT: C5.2 R1.1 U2.8 U4.38 | length 2203.6
  Top Layer w7.87: U2.8@919.37,89.53 919.37,109.37 976.5,166.5 ; R1.1@991,165 C5.2@1041,165 ; R1.1@991,166.5 976.5,166.5 ; C5.2@1041,166.5 976.5,166.5 ; U4.38@2111.02,79.53 2111.02,99 ; 2111.02,118.02 2111.02,99 ; v2(2129,173) 2129,157 ; 976.5,166.5 ccw(c976.5,180.8) R1.1@986.68,170.76 ; 976.5,166.5 cw(c976.5,152.21) R1.1@986.68,162.25 ; 976.5,166.5 ccw(c976.5,180.8) R1.1@986.68,170.76 ; 976.5,166.5 cw(c976.5,152.21) R1.1@986.68,162.25 ; 976.5,166.5 ccw(c976.5,180.8) R1.1@986.68,170.76 ; 976.5,166.5 cw(c976.5,152.21) R1.1@986.68,162.25 ; 976.5,166.5 ccw(c976.5,180.8) R1.1@986.68,170.76 ; 976.5,166.5 cw(c976.5,152.21) R1.1@986.68,162.25 ; v2@1005.64,166.5 ccw(c1005.64,151.87) 995.29,162.22 cw(c1005.64,151.87) v2@1005.64,166.5 ; v2@1005.64,166.5 cw(c1005.64,181.14) 995.29,170.79 ccw(c1005.64,181.14) v2@1005.64,166.5 ; v2@1009.43,161.43 ccw(c997.19,149.19) 997.19,166.5 cw(c997.19,149.19) v2@1009.43,161.43 ; v2@1009.43,161.43 ccw(c1000.82,152.82) 1000.82,165 cw(c1000.82,152.82) v2@1009.43,161.43 ; v2@1009.43,172.57 cw(c994.79,187.21) 994.79,166.5 ccw(c994.79,187.21) v2@1009.43,172.57 ; v2@1009.43,172.57 cw(c991.16,190.84) 991.16,165 ccw(c991.16,190.84) v2@1009.43,172.57 ; v2@1020.57,161.43 cw(c1032.81,149.19) 1032.81,166.5 ccw(c1032.81,149.19) v2@1020.57,161.43 ; v2@1020.57,161.43 cw(c1029.18,152.82) 1029.18,165 ccw(c1029.18,152.82) v2@1020.57,161.43 ; v2@1020.57,172.57 ccw(c1035.21,187.21) 1035.21,166.5 cw(c1035.21,187.21) v2@1020.57,172.57 ; v2@1020.57,172.57 ccw(c1038.84,190.84) 1038.84,165 cw(c1038.84,190.84) v2@1020.57,172.57 ; v2@1026.36,166.5 ccw(c1026.36,181.14) 1036.71,170.79 cw(c1026.36,181.14) v2@1026.36,166.5 ; v2@1026.36,166.5 cw(c1026.36,151.87) 1036.71,162.22 ccw(c1026.36,151.87) v2@1026.36,166.5 ; 2111.02,99 2111.02,130.02 2129,148 2129,157 ; 2129,157 ccw(c2116.68,157) 2124.2,166.76 cw(c2116.68,157) 2129,157 ; 2129,157 cw(c2141.32,157) 2133.8,166.76 ccw(c2141.32,157) 2129,157 ; R1.1@995.29,159.22 cw(c1009.25,145.26) 1009.25,165 ccw(c1009.25,145.26) R1.1@995.29,159.22 ; R1.1@995.29,167.79 ccw(c1002.03,174.53) 1002.03,165 cw(c1002.03,174.53) R1.1@995.29,167.79 ; v2@1022.75,165 cw(c1022.75,145.25) 1036.71,159.22 ccw(c1022.75,145.25) v2@1022.75,165 ; 1029.97,165 ccw(c1029.97,174.53) 1036.71,167.79 cw(c1029.97,174.53) 1029.97,165
  Bottom Layer w7.87: v2(1015,167) 1309,167 1381,95 2051,95 v2(2129,173) ; 1034.01,167 ccw(c1034.01,147.99) 1020.57,161.43 cw(c1034.01,147.99) 1034.01,167 ; 1034.01,167 cw(c1034.01,186.01) 1020.57,172.57 ccw(c1034.01,186.01) 1034.01,167 ; 2115.56,159.56 ccw(c2102.12,173) 2121.13,173 cw(c2102.12,173) 2115.56,159.56 ; 2115.56,159.56 cw(c2129,146.12) 2129,165.13 ccw(c2129,146.12) 2115.56,159.56
DCDC_5V: C2.2 C7.2 C25.2 C26.1 L1.2 R2.1 R43.1 U3.2 | length 8438.9
  Top Layer w11.81: C2.2@1438,-64.37 1430.74,-57.11 1407.11,-57.11 ; 1512,64 1572,64 ; C25.2@1530,-64.37 1411,-64.37 ; C7.2@1544,62.06 1509,62.06 ; 1620,-73.19 1649.82,-73.19 1655,-68 1655,-23 ; 1623,-50 1626,-50 1646,-30 1646,-20 ; U3.2@1640.63,-61.37 1450,-61.37 ; U3.2@1642.13,-62.87 1635,-55.74 R43.1@1635,29 ; L1.2@1354.22,-110 1365.37,-110 1402.18,-73.19 ; L1.2@1354.22,-110 1354.22,-93.78 1398,-50 ; L1.2@1354.22,-110 1407.11,-57.11 ; L1.2@1354.22,-110 1399.85,-64.37 ; L1.2@1384.22,-92.52 cw(c1414.44,-92.52) 1393.07,-71.15 ; L1.2@1384.22,-92.52 cw(c1414.44,-92.52) 1393.07,-71.15 ; L1.2@1384.22,-92.52 cw(c1414.44,-92.52) 1393.07,-71.15 ; L1.2@1384.22,-92.52 cw(c1414.44,-92.52) 1393.07,-71.15 ; 1398,-50 ccw(c1432.3,-84.3) 1384.06,-89.38 cw(c1432.3,-84.3) 1398,-50 ; 1398,-50 cw(c1365.67,-17.68) 1358.76,-62.86 ccw(c1365.67,-17.68) 1398,-50 ; 1398,-50 1414.22,-50 ; 1399.85,-64.37 cw(c1399.85,-85.44) 1420.91,-84.83 ccw(c1399.85,-85.44) 1399.85,-64.37 ; 1399.85,-64.37 cw(c1383.37,-47.89) 1370.63,-67.4 ccw(c1383.37,-47.89) 1399.85,-64.37 ; 1399.85,-64.37 1411,-64.37 ; 1402.19,-73.18 cw(c1402.19,-92.96) 1421.37,-88.18 ccw(c1402.19,-92.96) 1402.19,-73.18 ; 1402.18,-73.19 1631.82,-73.19 U3.2@1655,-50 ; 1402.18,-73.19 1411,-64.37 ; 1407.11,-57.11 cw(c1380.81,-30.81) 1366.09,-64.97 ccw(c1380.81,-30.81) 1407.11,-57.11 ; 1407.11,-57.11 1414.22,-50 ; 1414.22,-50 U3.2@1655,-50 ; C2.2@1437.78,-78.8 cw(c1472.62,-113.64) 1472.62,-64.37 ccw(c1472.62,-113.64) C2.2@1437.78,-78.8 ; C2.2@1437.78,-78.8 cw(c1479.86,-120.89) 1479.86,-61.37 ccw(c1479.86,-120.89) C2.2@1437.78,-78.8 ; C2.2@1446.13,-87.15 cw(c1501.14,-142.16) 1501.14,-64.37 ccw(c1501.14,-142.16) C2.2@1446.13,-87.15 ; C2.2@1446.13,-87.15 cw(c1508.38,-149.4) 1508.38,-61.37 ccw(c1508.38,-149.4) C2.2@1446.13,-87.15 ; C2.2@1446.13,-87.15 cw(c1479.85,-120.88) 1479.85,-73.19 ccw(c1479.85,-120.88) C2.2@1446.13,-87.15 ; 1450,-61.37 cw(c1450,-122.32) 1502.97,-92.16 ccw(c1450,-122.32) 1450,-61.37 ; C2.2@1454.48,-95.51 cw(c1529.65,-170.67) 1529.65,-64.37 ccw(c1529.65,-170.67) C2.2@1454.48,-95.51 ; C2.2@1454.48,-95.51 cw(c1536.89,-177.92) 1536.89,-61.37 ccw(c1536.89,-177.92) C2.2@1454.48,-95.51 ; C2.2@1454.48,-95.51 cw(c1508.37,-149.39) 1508.37,-73.19 ccw(c1508.37,-149.39) C2.2@1454.48,-95.51 ; R2.1@1492.44,62.06 1499.5,55 1609,55 ; R2.1@1492.44,62.06 1509,62.06 ; R2.1@1492.44,62.06 1494.38,64 1572,64 ; C25.2@1505.52,-95.51 ccw(c1430.35,-170.67) 1430.35,-64.37 cw(c1430.35,-170.67) C25.2@1505.52,-95.51 ; C25.2@1505.52,-95.51 ccw(c1451.63,-149.39) 1451.63,-73.19 cw(c1451.63,-149.39) C25.2@1505.52,-95.51 ; 1509,62.06 1598.06,62.06 1600,64 ; C25.2@1513.87,-87.15 ccw(c1458.86,-142.16) 1458.86,-64.37 cw(c1458.86,-142.16) C25.2@1513.87,-87.15 ; C25.2@1513.87,-87.15 ccw(c1480.15,-120.88) 1480.15,-73.19 cw(c1480.15,-120.88) C25.2@1513.87,-87.15 ; C25.2@1526.13,-87.15 cw(c1588.38,-149.4) 1588.38,-61.37 ccw(c1588.38,-149.4) C25.2@1526.13,-87.15 ; C25.2@1526.13,-87.15 cw(c1559.85,-120.88) 1559.85,-73.19 ccw(c1559.85,-120.88) C25.2@1526.13,-87.15 ; 1531.55,64 ccw(c1531.55,77.51) C7.2@1541.1,67.96 ; 1531.55,64 ccw(c1531.55,77.51) C7.2@1541.1,67.96 ; 1531.55,64 ccw(c1531.55,77.51) C7.2@1541.1,67.96 ; 1531.55,64 ccw(c1531.55,77.51) C7.2@1541.1,67.96 ; C25.2@1534.48,-95.51 cw(c1616.89,-177.92) 1616.89,-61.37 ccw(c1616.89,-177.92) C25.2@1534.48,-95.51 ; C25.2@1534.48,-95.51 cw(c1588.37,-149.39) 1588.37,-73.19 ccw(c1588.37,-149.39) C25.2@1534.48,-95.51 ; C7.2@1546.9,67.96 ccw(c1556.45,77.51) 1556.45,64 ; C7.2@1546.9,67.96 ccw(c1556.45,77.51) 1556.45,64 ; C7.2@1546.9,67.96 ccw(c1556.45,77.51) 1556.45,64 ; C7.2@1546.9,67.96 ccw(c1556.45,77.51) 1556.45,64 ; 1572,64 1596,64 ; 1596,64 1600,64 ; 1596,64 1613,64 1655,22 1655,-23 ; 1600,64 1609,55 ; 1609,55 R43.1@1635,29 ; R43.1@1635,29 1646,18 1646,-20 ; U3.2@1636.45,-68.55 ccw(c1619.11,-85.89) 1619.11,-61.37 cw(c1619.11,-85.89) U3.2@1636.45,-68.55 ; U3.2@1636.45,-68.55 ccw(c1591.66,-113.34) 1591.66,-50 cw(c1591.66,-113.34) U3.2@1636.45,-68.55 ; U3.2@1636.45,-51.45 ccw(c1613.39,-28.39) 1646,-28.39 cw(c1613.39,-28.39) U3.2@1636.45,-51.45 ; U3.2@1636.45,-51.45 cw(c1612.49,-27.49) 1612.49,-61.37 ccw(c1612.49,-27.49) U3.2@1636.45,-51.45 ; U3.2@1636.45,-51.45 cw(c1583.97,1.03) 1583.97,-73.19 ccw(c1583.97,1.03) U3.2@1636.45,-51.45 ; U3.2@1639.26,-49.35 ccw(c1625.07,-23) 1655,-23 ; U3.2@1639.26,-49.35 ccw(c1625.07,-23) 1655,-23 ; U3.2@1639.26,-49.35 ccw(c1625.07,-23) 1655,-23 ; U3.2@1639.26,-49.35 ccw(c1625.07,-23) 1655,-23 ; U3.2@1644.79,-59.8 ccw(c1634.3,-49.8) 1644.55,-39.55 cw(c1634.3,-49.8) U3.2@1644.79,-59.8 ; U3.2@1644.8,-59.8 cw(c1612.48,-27.48) 1612.48,-73.18 ccw(c1612.48,-27.48) U3.2@1644.8,-59.8 ; U3.2@1644.87,-59.75 ccw(c1635.72,-42.78) U3.2@1655,-42.78 ; U3.2@1644.87,-59.75 ccw(c1635.72,-42.78) U3.2@1655,-42.78 ; U3.2@1644.87,-59.75 ccw(c1635.72,-42.78) U3.2@1655,-42.78 ; U3.2@1644.87,-59.75 ccw(c1635.72,-42.78) U3.2@1655,-42.78 ; 1646,-41 ccw(c1655.72,-41) 1650.94,-49.47 cw(c1655.72,-41) 1646,-41 ; 1646,-41 cw(c1637.76,-41) 1640.7,-48.7 ccw(c1637.76,-41) 1646,-41 ; 1646,-41 1646,-20 ; 1646,-41 U3.2@1655,-50 ; U3.2@1653.55,-51.45 cw(c1671.78,-33.22) 1646,-33.22 ccw(c1671.78,-33.22) U3.2@1653.55,-51.45 ; U3.2@1653.55,-51.45 cw(c1698.34,-6.66) 1635,-6.66 ccw(c1698.34,-6.66) U3.2@1653.55,-51.45 ; U3.2@1655,-50 1655,-23 ; L1.2@1356.97,-74.54 ccw(c1361.29,-46.29) 1381.5,-66.5 cw(c1361.29,-46.29) L1.2@1356.97,-74.54 ; L1.2@1361.42,-75.82 ccw(c1373.4,-48.02) 1394.8,-69.42 cw(c1373.4,-48.02) L1.2@1361.42,-75.82 ; L1.2@1364.17,-77.29 ccw(c1375.24,-60.34) 1389.56,-74.66 cw(c1375.24,-60.34) L1.2@1364.17,-77.29 ; L1.2@1372.31,-90.62 cw(c1400.62,-87.64) 1380.49,-67.51 ccw(c1400.62,-87.64) L1.2@1372.31,-90.62 ; 1404.79,-70.58 cw(c1427.75,-93.54) 1450.37,-70.25 ccw(c1427.75,-93.54) 1404.79,-70.58 ; 1412.01,-64.37 cw(c1412.01,-85.09) 1432.72,-84.48 ccw(c1412.01,-85.09) 1412.01,-64.37 ; C2.2@1417.3,-73.19 cw(c1417.3,-89.19) 1432.83,-85.32 ccw(c1417.3,-89.19) C2.2@1417.3,-73.19 ; C2.2@1429.43,-70.45 cw(c1451.35,-92.37) 1451.35,-61.37 ccw(c1451.35,-92.37) C2.2@1429.43,-70.45 ; 1430.51,-56.88 cw(c1416.05,-71.33) 1433.33,-82.26 ccw(c1416.05,-71.33) 1430.51,-56.88 ; 1470.32,-61.37 cw(c1470.32,-110.75) 1513.23,-86.32 ccw(c1470.32,-110.75) 1470.32,-61.37 ; 1487.38,-64.37 cw(c1487.38,-113.64) 1522.22,-78.8 ccw(c1487.38,-113.64) 1487.38,-64.37 ; 1490.64,-61.37 cw(c1490.64,-99.18) 1523.5,-80.47 ccw(c1490.64,-99.18) 1490.64,-61.37 ; R2.1@1495.34,61.96 ccw(c1512.13,78.76) 1512.13,55 cw(c1512.13,78.76) R2.1@1495.34,61.96 ; R2.1@1495.34,67.96 ccw(c1504.89,77.51) 1504.89,64 cw(c1504.89,77.51) R2.1@1495.34,67.96 ; 1508.55,55 cw(c1508.55,-76.45) 1601.5,16.5 ccw(c1508.55,-76.45) 1508.55,55 ; C25.2@1509.43,-70.45 cw(c1531.35,-92.37) 1531.35,-61.37 ccw(c1531.35,-92.37) C25.2@1509.43,-70.45 ; 1510.95,-61.37 cw(c1510.95,-87.62) 1533.76,-74.63 ccw(c1510.95,-87.62) 1510.95,-61.37 ; C25.2@1517.78,-78.8 cw(c1559.86,-120.89) 1559.86,-61.37 ccw(c1559.86,-120.89) C25.2@1517.78,-78.8 ; 1524.31,55 ccw(c1524.31,78.76) 1541.1,61.96 cw(c1524.31,78.76) 1524.31,55 ; 1531.27,-61.37 cw(c1531.27,-76.05) 1544.02,-68.79 ccw(c1531.27,-76.05) 1531.27,-61.37 ; C7.2@1537.06,55 cw(c1537.06,-47.94) 1609.85,24.85 ccw(c1537.06,-47.94) C7.2@1537.06,55 ; C7.2@1546.9,61.96 ccw(c1563.69,78.76) 1563.69,55 cw(c1563.69,78.76) C7.2@1546.9,61.96 ; 1552.04,-61.37 cw(c1552.04,-110.96) 1587.1,-75.9 ccw(c1552.04,-110.96) 1552.04,-61.37 ; 1565.57,55 cw(c1565.57,-19.42) 1618.2,33.2 ccw(c1565.57,-19.42) 1565.57,55 ; 1579.67,-73.19 ccw(c1579.67,-62.67) 1587.1,-70.1 cw(c1579.67,-62.67) 1579.67,-73.19 ; 1580.55,-61.37 cw(c1580.55,-82.45) 1595.46,-67.54 ccw(c1580.55,-82.45) 1580.55,-61.37 ; C26.1@1584.54,-67.54 cw(c1599.45,-82.45) 1599.45,-61.37 ccw(c1599.45,-82.45) C26.1@1584.54,-67.54 ; C26.1@1592.9,-75.9 cw(c1627.96,-110.96) 1627.96,-61.37 ccw(c1627.96,-110.96) C26.1@1592.9,-75.9 ; C26.1@1592.9,-70.1 ccw(c1600.33,-62.67) 1600.33,-73.19 cw(c1600.33,-62.67) C26.1@1592.9,-70.1 ; 1594.09,55 cw(c1594.09,9.09) 1626.55,41.55 ccw(c1594.09,9.09) 1594.09,55 ; R43.1@1602.2,15.83 cw(c1535.42,-58.04) 1635,-58.04 ccw(c1535.42,-58.04) R43.1@1602.2,15.83 ; 1602.85,61.15 cw(c1584.67,42.98) 1608.3,32.86 ccw(c1584.67,42.98) 1602.85,61.15 ; R43.1@1610.12,24.6 cw(c1559.46,-31.44) 1635,-31.44 ccw(c1559.46,-31.44) R43.1@1610.12,24.6 ; R43.1@1612.89,34 cw(c1626.99,7.28) 1648.35,28.65 ccw(c1626.99,7.28) R43.1@1612.89,34 ; 1616.25,60.75 cw(c1598.15,42.65) 1618.62,27.28 ccw(c1598.15,42.65) 1616.25,60.75 ; R43.1@1618.04,33.36 cw(c1583.51,-4.84) 1635,-4.84 ccw(c1583.51,-4.84) R43.1@1618.04,33.36 ; R43.1@1618.44,23.58 cw(c1628.76,4.28) 1644.24,19.76 ccw(c1628.76,4.28) R43.1@1618.44,23.58 ; 1620.17,-50 cw(c1620.17,-84.83) 1644.8,-60.2 ccw(c1620.17,-84.83) 1620.17,-50 ; 1635,-35.17 ccw(c1669.83,-35.17) 1645.2,-59.8 cw(c1669.83,-35.17) 1635,-35.17
DCDC_EN: D3.1 U4.36 | length 1717.3
  Top Layer w7.87: D3.1@1110,132.76 v2(1129.76,132.76) ; U4.36@2142.52,79.53 2142.52,101.52 v2(2172,131) ; D3.1@1110.75,132.76 ccw(c1110.75,151.77) 1124.19,138.32 cw(c1110.75,151.77) D3.1@1110.75,132.76 ; D3.1@1110.75,132.76 cw(c1110.75,113.75) 1124.19,127.19 ccw(c1110.75,113.75) D3.1@1110.75,132.76 ; v2@1128.51,132.76 ccw(c1128.51,104.24) 1108.35,124.4 cw(c1128.51,104.24) v2@1128.51,132.76 ; v2@1128.51,132.76 cw(c1128.51,161.27) 1108.35,141.11 ccw(c1128.51,161.27) v2@1128.51,132.76 ; 2158.56,117.56 ccw(c2145.12,131) 2164.13,131 cw(c2145.12,131) 2158.56,117.56 ; 2158.56,117.56 cw(c2172,104.12) 2172,123.13 ccw(c2172,104.12) 2158.56,117.56
  Bottom Layer w7.87: v2(1129.76,132.76) 1258.24,132.76 1317,74 ; 1308.99,82.01 1325,66 1395,66 ; 1367,66 1395,66 ; 2101,74 2087,74 2115,74 v2(2172,131) ; v2@2166,131 2101,66 1395,66 ; 1148.77,132.76 ccw(c1148.77,113.75) 1135.32,127.19 cw(c1148.77,113.75) 1148.77,132.76 ; 1148.77,132.76 cw(c1148.77,151.77) 1135.32,138.32 ccw(c1148.77,151.77) 1148.77,132.76 ; 2158.56,117.56 ccw(c2145.12,131) 2164.13,131 cw(c2145.12,131) 2158.56,117.56 ; 2158.56,117.56 cw(c2172,104.12) v2@2172,123.13 ; 2158.56,117.56 cw(c2172,104.12) v2@2172,123.13 ; v2@2172,123.13 ccw(c2172,89.63) 2148.32,113.32 cw(c2172,89.63) v2@2172,123.13